# Altium PCB lab2_zhernakov_buck.PcbDoc
Units mm, origin at the board's own origin, x right, y up, seen from the top; angles counter-clockwise.
Board outline 87.7 x 31.5 mm, 2 copper layers (Top Layer, Bottom Layer), stack 1.57 mm thick; 33 components, 19 nets, 113 pads, 148 vias.
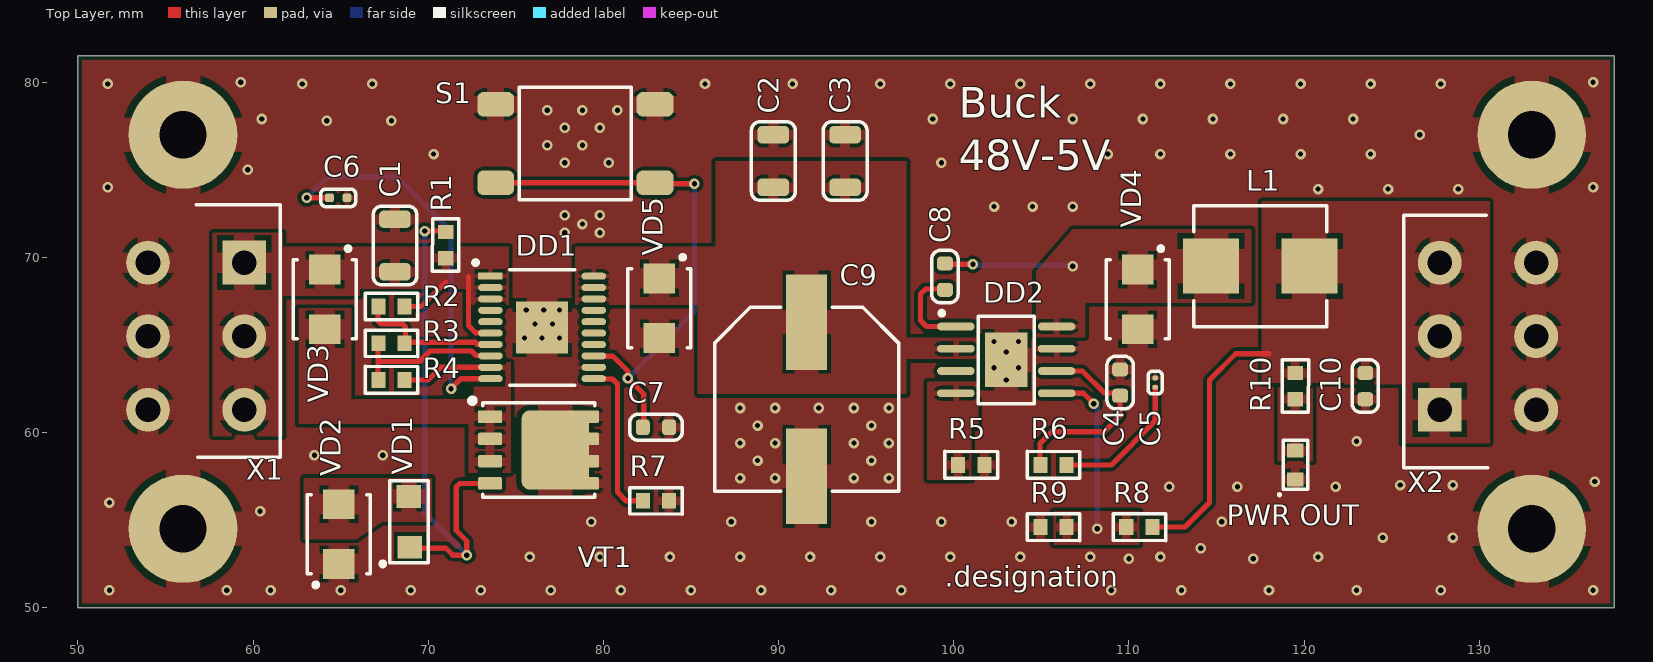
[diagram p0: Top Layer view]
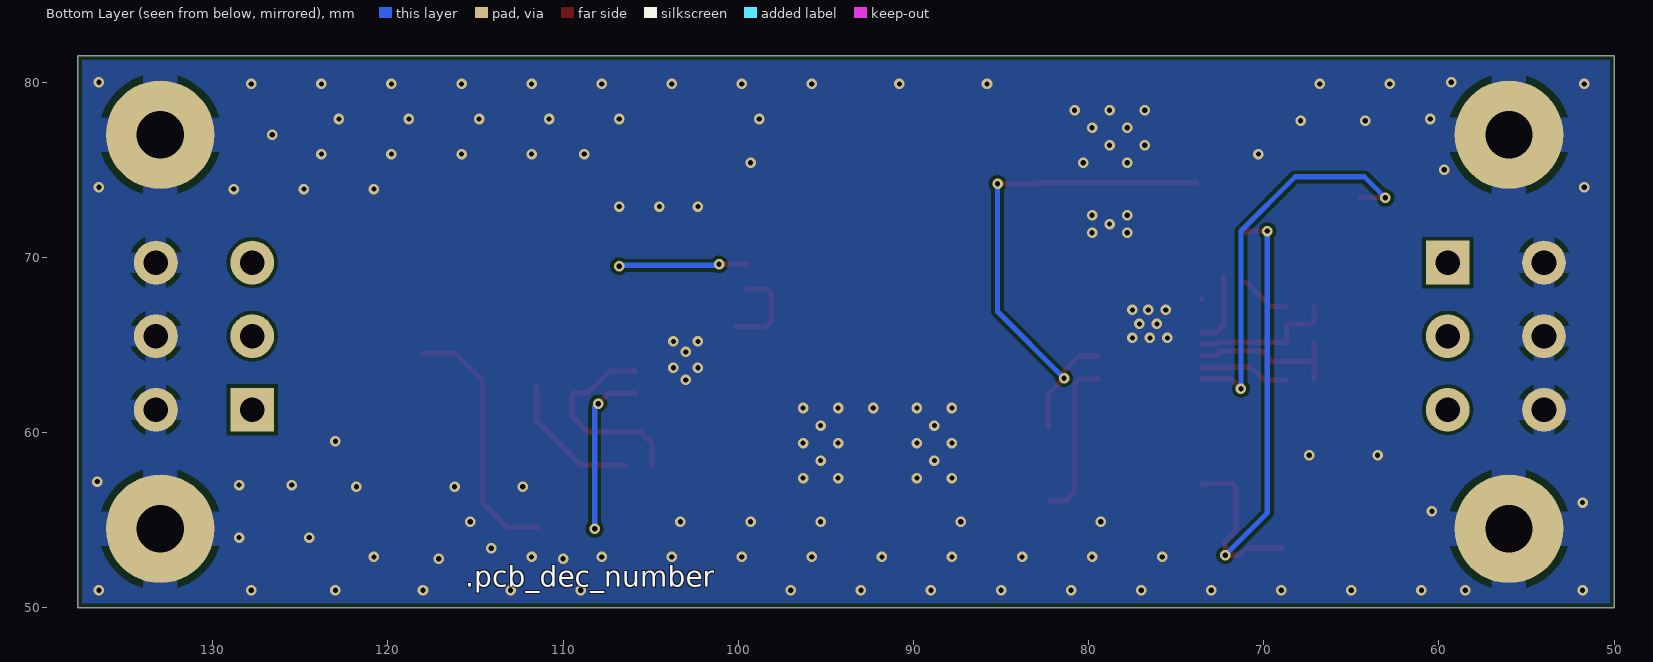
[diagram p1: Bottom Layer view, seen from below]
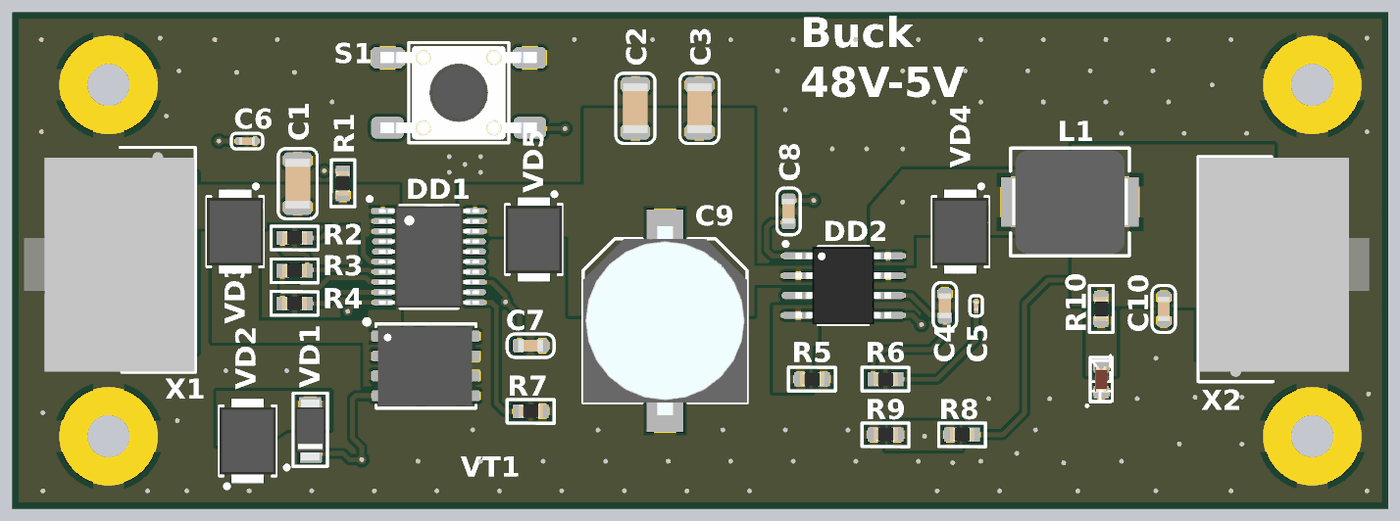
[diagram p2: 3D render of the assembled board from above, using the file's embedded part models]

## Layer stack, top to bottom
Top Solder: solder mask 0.0102, Solder Resist, Dk 3.5
Top Layer: signal copper 0.035
Core 1: core 1.5, FR4, Dk 4.6
Bottom Layer: signal copper 0.035
Bottom Solder: solder mask 0.0102, Solder Resist, Dk 3.5

## Board outline
50,50 137.7,50 137.7,81.5 50,81.5

## Design rules (kind name [scope] priority, off if disabled: settings)
AcuteAngle min_acute_angle [OnCopper] p1: minimum=3.50000000000000E+0001 checktracksonly=FALSE // Минимальный угол между примитивами топологии
BoardOutlineClearance board_outline_clearance_std [NOT (OnLayer('Bottom Overlay') OR OnLayer('Top Overlay'))] p1: gap=0.25 ignorepadtopadclearanceinfootprint=FALSE except(0: Arc-SplitContinuation Track-SplitContinuation SMDPad-SplitContinuation THPad-SplitContinuation Via-SplitContinuation Fill-SplitContinuation Poly-SplitContinuation Region-SplitContinuation Text-SplitContinuation) // Отступ элементов топологии от края фрезеруемой печатной платы
Clearance clearance_outer_35um_std [OnTopLayer OR OnBottomLayer] p1: gap=0.2 ignorepadtopadclearanceinfootprint=TRUE except(0.25: Arc-Hole Track-Hole SMDPad-Hole THPad-Hole Via-Hole Fill-Hole Poly-Hole Region-Hole Text-Hole) // Зазоры на внешних слоях
Clearance clearance_inner_35um_std [NOT (OnTopLayer Or OnBottomLayer)] p2: gap=0.2 ignorepadtopadclearanceinfootprint=FALSE except(0.25: Arc-Hole Track-Hole SMDPad-Hole THPad-Hole Via-Hole Fill-Hole Poly-Hole Region-Hole Text-Hole) // Зазоры на внутренних слоях
ComponentClearance [All] p1: gap=0 collisioncheckmode=3 verticalgap=0 showdistances=FALSE
DiffPairsRouting diff_pairs_routing [All] p1: maxlimit=0.127 minlimit=0.127 mostfreqgap=0.127 toplayer_minwidth=0.143 toplayer_maxwidth=0.143 toplayer_prefwidth=0.143 bottomlayer_minwidth=0.143 bottomlayer_maxwidth=0.143 bottomlayer_prefwidth=0.143 impedanceprofiledriven=TRUE impedanceprofileid={FD46899E-B5A2-4EF5-A302-5D2DB6A51F35} maxuncoupledlength=12.7 // Правила трассировки дифференциальных пар
HoleSize min_hole_size_std [IsPad] p1: absolutevalues=TRUE maxlimit=5.9 minlimit=0.6 maxpercent=80.000 minpercent=20.000 // Диаметр межслойного переходного отверстия
HoleSize min_hole_size_via_std [IsVia] p2: absolutevalues=TRUE maxlimit=5.9 minlimit=0.3 maxpercent=80.000 minpercent=20.000 // Минимальный диаметр монтажного отверстия
HoleToHoleClearance hole_to_hole_clearance_std [All] p1: gap=0.2 allowstackedmicrovias=FALSE // Минимальное расстояние между краями двух отверстий
MinimumAnnularRing min_via_ar_std [All] p1: minimumring=0.15 // Поясок площадки переходного отверстия (Annular ring VIA)
MinimumAnnularRing min_pad_ar_std [All] p2: minimumring=0.2 // Поясок монтажной контактной площадки (Annular ring PAD)
MinimumSolderMaskSliver min_solder_mask_bridge_std [All] p1: minsoldermaskwidth=0.15 // Мнимальная ширина масочного мостика
PlaneClearance plane_clearance_35um_std [All] p1: clearance=0.2 // Отступ полигона (для слоя plane) от элементов топологии
PlaneConnect [All] p1: planeconnectstyle=Relief reliefexpansion=0.5 reliefentries=4 reliefconductorwidth=0.2 reliefairgap=0.2
PolygonConnect poly_connect_to_pad<=0.3 [(AsMM(PadXSize_AllLayers)<=0.301) or (AsMM(PadYSize_AllLayers)<=0.301)] p1: thpad.connectstyle=Relief thpad.reliefconductorwidth=0.2 thpad.reliefentries=4 thpad.polygonreliefangle="90 Angle" thpad.airgapwidth=0.2 smdpad.connectstyle=Relief smdpad.reliefconductorwidth=0.2 smdpad.reliefentries=4 smdpad.polygonreliefangle="90 Angle" smdpad.airgapwidth=0.2 via.connectstyle=Direct via.reliefconductorwidth=0.254 via.reliefentries=4 via.polygonreliefangle="90 Angle" via.airgapwidth=0.254 // Правила подключения полигонов для падов от 0,3мм и меньше
PolygonConnect poly_connect_to_pad<=0.4 [(AsMM(PadXSize_AllLayers)<=0.401) or (AsMM(PadYSize_AllLayers)<=0.401)] p2: thpad.connectstyle=Relief thpad.reliefconductorwidth=0.26 thpad.reliefentries=4 thpad.polygonreliefangle="90 Angle" thpad.airgapwidth=0.2 smdpad.connectstyle=Relief smdpad.reliefconductorwidth=0.26 smdpad.reliefentries=4 smdpad.polygonreliefangle="90 Angle" smdpad.airgapwidth=0.2 via.connectstyle=Direct via.reliefconductorwidth=0.254 via.reliefentries=4 via.polygonreliefangle="90 Angle" via.airgapwidth=0.254 // Правила подключения полигонов для падов от 0,4 и меньше
PolygonConnect poly_connect_to_pad<=0.6 [(AsMM(PadXSize_AllLayers)<=0.601) or (AsMM(PadYSize_AllLayers)<=0.601)] p3: thpad.connectstyle=Relief thpad.reliefconductorwidth=0.33 thpad.reliefentries=4 thpad.polygonreliefangle="90 Angle" thpad.airgapwidth=0.2 smdpad.connectstyle=Relief smdpad.reliefconductorwidth=0.33 smdpad.reliefentries=4 smdpad.polygonreliefangle="90 Angle" smdpad.airgapwidth=0.2 via.connectstyle=Direct via.reliefconductorwidth=0.254 via.reliefentries=4 via.polygonreliefangle="90 Angle" via.airgapwidth=0.254 // Правила подключения полигонов для падов от 0,6мм и меньше
PolygonConnect poly_connect_to_pad<=0.7 [(AsMM(PadXSize_AllLayers)<=0.701) or (AsMM(PadYSize_AllLayers)<=0.701)] p4: thpad.connectstyle=Relief thpad.reliefconductorwidth=0.46 thpad.reliefentries=4 thpad.polygonreliefangle="90 Angle" thpad.airgapwidth=0.2 smdpad.connectstyle=Relief smdpad.reliefconductorwidth=0.46 smdpad.reliefentries=4 smdpad.polygonreliefangle="90 Angle" smdpad.airgapwidth=0.2 via.connectstyle=Direct via.reliefconductorwidth=0.254 via.reliefentries=4 via.polygonreliefangle="90 Angle" via.airgapwidth=0.254 // Правила подключения полигонов для падов от 0,7мм и меньше
PolygonConnect poly_connect_to_pad<=0.8 [(AsMM(PadXSize_AllLayers)<=0.8)or(AsMM(PadYSize_AllLayers)<=0.8)] p5: thpad.connectstyle=Relief thpad.reliefconductorwidth=0.53 thpad.reliefentries=4 thpad.polygonreliefangle="90 Angle" thpad.airgapwidth=0.3 smdpad.connectstyle=Relief smdpad.reliefconductorwidth=0.53 smdpad.reliefentries=4 smdpad.polygonreliefangle="90 Angle" smdpad.airgapwidth=0.2 via.connectstyle=Direct via.reliefconductorwidth=0.254 via.reliefentries=4 via.polygonreliefangle="90 Angle" via.airgapwidth=0.254 // Правила подключения полигонов для падов от 0,8мм и меньше
PolygonConnect poly_connect_to_pad<=1 [(AsMM(PadXSize_AllLayers)<=1.01)or(AsMM(PadYSize_AllLayers)<=1.01)] p6: thpad.connectstyle=Relief thpad.reliefconductorwidth=0.6 thpad.reliefentries=4 thpad.polygonreliefangle="90 Angle" thpad.airgapwidth=0.3 smdpad.connectstyle=Relief smdpad.reliefconductorwidth=0.6 smdpad.reliefentries=4 smdpad.polygonreliefangle="90 Angle" smdpad.airgapwidth=0.2 via.connectstyle=Direct via.reliefconductorwidth=0.254 via.reliefentries=4 via.polygonreliefangle="90 Angle" via.airgapwidth=0.254 // Правила подключения полигонов для падов от 1мм и меньше
PolygonConnect poly_connect_to_pad<=1.3 [(AsMM(PadXSize_AllLayers)<=1.31)or(AsMM(PadYSize_AllLayers)<=1.31)] p7: thpad.connectstyle=Relief thpad.reliefconductorwidth=0.66 thpad.reliefentries=4 thpad.polygonreliefangle="90 Angle" thpad.airgapwidth=0.3 smdpad.connectstyle=Relief smdpad.reliefconductorwidth=0.86 smdpad.reliefentries=4 smdpad.polygonreliefangle="90 Angle" smdpad.airgapwidth=0.2 via.connectstyle=Direct via.reliefconductorwidth=0.254 via.reliefentries=4 via.polygonreliefangle="90 Angle" via.airgapwidth=0.254 // Правила подключения полигонов для падов от 1,3мм и меньше
PolygonConnect poly_connect_to_pad<=1.6 [(AsMM(PadXSize_AllLayers)<=1.61)or(AsMM(PadYSize_AllLayers)<=1.61)] p8: thpad.connectstyle=Relief thpad.reliefconductorwidth=0.8 thpad.reliefentries=4 thpad.polygonreliefangle="90 Angle" thpad.airgapwidth=0.3 smdpad.connectstyle=Relief smdpad.reliefconductorwidth=1 smdpad.reliefentries=4 smdpad.polygonreliefangle="90 Angle" smdpad.airgapwidth=0.2 via.connectstyle=Direct via.reliefconductorwidth=0.254 via.reliefentries=4 via.polygonreliefangle="90 Angle" via.airgapwidth=0.254 // Правила подключения полигонов для падов от 1,6мм и меньше
PolygonConnect poly_connect_to_pad<=1.8 [(AsMM(PadXSize_AllLayers)<=1.8)or(AsMM(PadYSize_AllLayers)<=1.8)] p9: thpad.connectstyle=Relief thpad.reliefconductorwidth=1 thpad.reliefentries=4 thpad.polygonreliefangle="90 Angle" thpad.airgapwidth=0.3 smdpad.connectstyle=Relief smdpad.reliefconductorwidth=1.2 smdpad.reliefentries=4 smdpad.polygonreliefangle="90 Angle" smdpad.airgapwidth=0.2 via.connectstyle=Direct via.reliefconductorwidth=0.254 via.reliefentries=4 via.polygonreliefangle="90 Angle" via.airgapwidth=0.254 // Правила подключения полигонов для падов от 1,8мм и меньше
PolygonConnect poly_connect_to_pad<=2 [(AsMM(PadXSize_AllLayers)<=2.01)or(AsMM(PadYSize_AllLayers)<=2.01)] p10: thpad.connectstyle=Relief thpad.reliefconductorwidth=1.1 thpad.reliefentries=4 thpad.polygonreliefangle="90 Angle" thpad.airgapwidth=0.3 smdpad.connectstyle=Relief smdpad.reliefconductorwidth=1.4 smdpad.reliefentries=4 smdpad.polygonreliefangle="90 Angle" smdpad.airgapwidth=0.2 via.connectstyle=Direct via.reliefconductorwidth=0.254 via.reliefentries=4 via.polygonreliefangle="90 Angle" via.airgapwidth=0.254 // Правила подключения полигонов для падов от 2мм и меньше
PolygonConnect poly_connect_to_pad<=2.3 [(AsMM(PadXSize_AllLayers)<=2.31)or(AsMM(PadYSize_AllLayers)<=2.31)] p11: thpad.connectstyle=Relief thpad.reliefconductorwidth=1.2 thpad.reliefentries=4 thpad.polygonreliefangle="90 Angle" thpad.airgapwidth=0.3 smdpad.connectstyle=Relief smdpad.reliefconductorwidth=1.4 smdpad.reliefentries=4 smdpad.polygonreliefangle="90 Angle" smdpad.airgapwidth=0.2 via.connectstyle=Direct via.reliefconductorwidth=0.254 via.reliefentries=4 via.polygonreliefangle="90 Angle" via.airgapwidth=0.254 // Правила подключения полигонов для падов от 2,3мм и меньше
PolygonConnect poly_connect_to_pad<=2.5 [(AsMM(PadXSize_AllLayers)<=2.51)or(AsMM(PadYSize_AllLayers)<=2.51)] p12: thpad.connectstyle=Relief thpad.reliefconductorwidth=1.2 thpad.reliefentries=4 thpad.polygonreliefangle="90 Angle" thpad.airgapwidth=0.3 smdpad.connectstyle=Relief smdpad.reliefconductorwidth=1.4 smdpad.reliefentries=4 smdpad.polygonreliefangle="90 Angle" smdpad.airgapwidth=0.2 via.connectstyle=Direct via.reliefconductorwidth=0.254 via.reliefentries=4 via.polygonreliefangle="90 Angle" via.airgapwidth=0.254 // Правила подключения полигонов для падов от 2,5мм и меньше
PolygonConnect poly_connect_to_pad<=2.7 [(AsMM(PadXSize_AllLayers)<=2.71)or(AsMM(PadYSize_AllLayers)<=2.71)] p13: thpad.connectstyle=Relief thpad.reliefconductorwidth=1.4 thpad.reliefentries=4 thpad.polygonreliefangle="90 Angle" thpad.airgapwidth=0.3 smdpad.connectstyle=Relief smdpad.reliefconductorwidth=1.6 smdpad.reliefentries=4 smdpad.polygonreliefangle="90 Angle" smdpad.airgapwidth=0.2 via.connectstyle=Direct via.reliefconductorwidth=0.254 via.reliefentries=4 via.polygonreliefangle="90 Angle" via.airgapwidth=0.254 // Правила подключения полигонов для падов от 2,7мм и меньше
PolygonConnect poly_connect_to_pad<=3 [(AsMM(PadXSize_AllLayers)<=3.01)or(AsMM(PadYSize_AllLayers)<=3.01)] p14: thpad.connectstyle=Relief thpad.reliefconductorwidth=1.6 thpad.reliefentries=4 thpad.polygonreliefangle="90 Angle" thpad.airgapwidth=0.3 smdpad.connectstyle=Relief smdpad.reliefconductorwidth=1.8 smdpad.reliefentries=4 smdpad.polygonreliefangle="90 Angle" smdpad.airgapwidth=0.2 via.connectstyle=Direct via.reliefconductorwidth=0.254 via.reliefentries=4 via.polygonreliefangle="90 Angle" via.airgapwidth=0.254 // Правила подключения полигонов для падов от 3мм и меньше
PolygonConnect poly_connect_to_pad<=7 [(AsMM(PadXSize_AllLayers)<7.01)or(AsMM(PadYSize_AllLayers)<=7.01)] p15: thpad.connectstyle=Relief thpad.reliefconductorwidth=2 thpad.reliefentries=4 thpad.polygonreliefangle="90 Angle" thpad.airgapwidth=0.4 smdpad.connectstyle=Relief smdpad.reliefconductorwidth=2 smdpad.reliefentries=4 smdpad.polygonreliefangle="90 Angle" smdpad.airgapwidth=0.3 via.connectstyle=Direct via.reliefconductorwidth=0.254 via.reliefentries=4 via.polygonreliefangle="90 Angle" via.airgapwidth=0.254 // Правила подключения полигонов для падов от 7мм и меньше
PolygonConnect poly_connect_to_pad [All] p16: thpad.connectstyle=Relief thpad.reliefconductorwidth=0.25 thpad.reliefentries=4 thpad.polygonreliefangle="90 Angle" thpad.airgapwidth=0.2 smdpad.connectstyle=Relief smdpad.reliefconductorwidth=0.25 smdpad.reliefentries=4 smdpad.polygonreliefangle="90 Angle" smdpad.airgapwidth=0.2 via.connectstyle=Direct via.reliefconductorwidth=0.25 via.reliefentries=4 via.polygonreliefangle="90 Angle" via.airgapwidth=0.2 // Правила подключения полигонов общие
RoutingCorners [All] p1 off: cornerstyle=45-Degree minsetback=2.5 maxsetback=2.5
RoutingVias [All] p1: holewidth=0.3 width=0.6 viastyle="Through Hole" minholewidth=0.3 minwidth=0.6 maxholewidth=5.9 maxwidth=6.4
SilkToSilkClearance silk_to_silk_clearance_std [All] p1 off: silktosilkclearance=0.15 // Отступ текста шелкографии от других примитивов шелкографии
SilkToSolderMaskClearance silk_to_solder_mask_clearance_std [IsPad] p1 off: minsilkscreentomaskgap=0.15 clearancetoexposedcopper=FALSE // Минимальное расстояние между элементами шелкографии и вскрытой медью
SolderMaskExpansion solder_mask_expansion_std [All] p1: expansion=0.05 // Припуск паяльной масски
UnRoutedNet [All] p1: checkbadconnections=TRUE
Width width_35um_std [All] p1: maxlimit=10 minlimit=0.2 preferedwidth=0.2 checkconnectedcopper=TRUE // Ширина проводников (общая)
19 further rules are at their usual default settings.

## Components (designator, comment, footprint, x,y, rotation, side; value= is the part's Value field where it differs from the comment)
C1 "1 мк" C1206 68.1,70.675 r90 top
C2 "2,2 мк" C1206 89.7,75.5 r90 top
C3 "2,2 мк" C1206 93.8,75.5 r90 top
C4 "82" C0603 109.5,62.85 r90 top
C5 "0,022 мк" C0201 111.5,62.85 r90 top
C6 "6800" C0402 64.86,73.4 r0 top
C7 "0,1 мк" C0603 83,60.3 r0 top
C8 "0,1 мк" C0603 99.5,68.9 r270 top
C9 "47 мк" CAPAE-1000X1000X1200 91.6,61.9 r270 top
C10 "22 мк" C0603 123.5,62.65 r270 top
DD1 "TPS16630PWPR" HTSSOP-20 76.5,66 r0 top
DD2 "TPS54360BDDA" HSOIC-8 103,64.15 r0 top
L1 "SRP7028A-220M" SRP-2-670X660X280 117.5,69.5 r0 top
"PWR OUT" "TLMS1000-GS08" HL0603 119.5,58.15 r90 top (schematic designator HL1)
R1 "750" R0603 71,70.7 r270 top
R2 "1,54 М" R0603 67.9,67.2 r0 top
R3 "8,06 к" R0603 67.9,65.1 r0 top
R4 "40,2 к" R0603 67.9,63 r180 top
R5 "97,6 к" R0603 101,58.15 r180 top
R6 "4,99 к" R0603 105.7,58.15 r180 top
R7 "5,1 к" R0603 83,56.1 r0 top
R8 "53,6 к" R0603 110.6,54.6 r0 top
R9 "10,2 к" R0603 105.7,54.6 r0 top
R10 "220" R0603 119.5,62.65 r90 top
S1 "FSM4JSMA" FSM4JSMA 78.4,76.5 r0 top
VD1 "BZD17C15P" DO-219AB 68.9,54.9 r90 top
VD2 "SS36-E3/57T" DO-214AB 64.9,54.2 r90 top
VD3 "1.5SMC62CA" DO-214AB 64.1,67.6 r270 top
VD4 "SS36-E3/57T" DO-214AB 110.5,67.6 r270 top
VD5 "SS36-E3/57T" DO-214AB 83.2,67.1 r270 top
VT1 "CSD19532Q5B" SON-8 76.3,59 r270 top
X1 "4-1775099-1" 4-1775099-1 56.75,65.5 r270 top
X2 "4-1775099-1" 4-1775099-1 130.5,65.5 r90 top

## Footprints (in the part's own frame and the unit in brackets; to place one, negate y for a bottom-side part, rotate by r counter-clockwise, add the part's x,y. Pads: shape width x height; smd on the part's side, far side on the other; paste and mask are expansions set on the pad)
4-1775099-1 [mm]
  rect 2.5x2.5 hole 1.4: 1(-4.2,2.75)
  round 2.5 hole 1.4: 2(0,2.75) 3(4.2,2.75) 4(-4.2,-2.75) 5(0,-2.75) 6(4.2,-2.75)
  silkscreen extent -7.5,0 6.9,4.8, body extent -7.2,-6.15 6.85,4.75, height 12.8
C0201 [mm] "Chip Capacitor, 2-Leads, Body 0,60x0,30mm, IPC Medium Density"
  rrect50% 0.28x0.3 smd: 1(-0.265,0) 2(0.265,0)
  silkscreen extent -0.65,-0.4 0.65,0.4, body extent -0.3,-0.15 0.3,0.15, height 0.29
C0402 [mm] "Chip Capacitor, 2-Leads, Body 1,00x0,50mm, IPC Medium Density"
  rrect50% 0.5x0.5 smd: 1(-0.5,0) 2(0.5,0)
  silkscreen extent -1,-0.5 1,0.5, body extent -0.5,-0.25 0.5,0.25, height 0.5
C0603 [mm] "Chip Capacitor, 2-Leads, Body 1,60x0,80mm, IPC Medium Density"
  rrect50% 0.8x0.9 smd: 1(-0.75,0) 2(0.75,0)
  silkscreen extent -1.5,-0.75 1.5,0.75, body extent -0.8,-0.4 0.8,0.4, height 0.8
C1206 [mm] "Chip Capacitor, 2-Leads, Body 3,20x1,60mm, IPC Medium Density"
  rrect50% 1x1.8 smd: 1(-1.5,0) 2(1.5,0)
  silkscreen extent -2.25,-1.25 2.25,1.25, body extent -1.6,-0.8 1.6,0.8, height 0.78
CAPAE-1000X1000X1200 [mm] "Aluminum Electrolytic Capacitor, Body 10,50x10,50x12,50mm, IPC Low Density"
  rect 5.45x2.35 smd: 1(-4.4,0) 2(4.4,0)
  silkscreen extent -5.25,-5.25 5.25,5.25, body extent -6.05,-5.25 6.05,5.25, height 12.5
DO-214AB [mm] "Molded Diode, 2-Leads, Body 6,86x5,91mm, IPC Medium Density"
  rect 1.7x1.8 smd: 1(-1.7,0) 2(1.7,0)
  silkscreen extent -3.02,-1.8 2.25,1.8, body extent -2.7,-1.81 2.7,1.81, height 2.43
DO-219AB [mm]
  rect 1.3x1.4 smd: 1(-1.45,-0.05) 2(1.45,0)
  silkscreen extent -2.45,-1.1 2.35,1.55, body extent -1.95,-0.95 1.95,0.95, height 1.25
FSM4JSMA [mm]
  rrect50% 2.1x1.4 smd: 1(-4.55,2.24) 1(4.55,2.24) 2(-4.55,-2.24) 2(4.55,-2.24)
  silkscreen extent -3.2,-3.2 3.2,3.2, body extent -5,-3 5,3, height 5.13
HL0603 [mm] "Chip Diode, 2-Leads, Body 1,60x0,80mm, IPC Medium Density"
  rect 0.8x0.95 smd: 1(-0.825,0) 2(0.825,0)
  silkscreen extent -1.75,-0.7 1.4,0.95, body extent -0.81,-0.4 0.81,0.4, height 0.6
HSOIC-8 [mm] "SOIC, 8-Leads, Body 4,90x3,90mm, Pitch 1,27mm, Thermal Pad 3,10x2,40mm, IPC Medium Density"
  rect 2.4x3.1 smd: 0(0,0)
  oval 2.15x0.45 smd: 1(-2.875,1.905) 2(-2.875,0.635) 3(-2.875,-0.635) 4(-2.875,-1.905) 5(2.875,-1.905) 6(2.875,-0.635) 7(2.875,0.635) 8(2.875,1.905)
  silkscreen extent -3.81,-2.5 1.6,2.79, body extent -3.06,-2.47 3.06,2.48, height 1.75
HTSSOP-20 [mm] "TSOP, 20-Leads, Body 6,50x4,40mm, Pitch 0,65mm, Thermal Pad 2,96x2,96mm, IPC Medium Density"
  rect 2.96x2.96 smd: 0(0,0)
  rect 1.4x0.4 smd: 1(-2.95,2.925)
  oval 1.4x0.4 smd: 2(-2.95,2.275) 3(-2.95,1.625) 4(-2.95,0.975) 5(-2.95,0.325) 6(-2.95,-0.325) 7(-2.95,-0.975) 8(-2.95,-1.625) 9(-2.95,-2.275) 10(-2.95,-2.925) 11(2.95,-2.925) 12(2.95,-2.275) 13(2.95,-1.625) 14(2.95,-0.975) 15(2.95,-0.325) 16(2.95,0.325) 17(2.95,0.975) 18(2.95,1.625) 19(2.95,2.275) 20(2.95,2.925)
  silkscreen extent -3.92,-3.3 1.85,3.82, body extent -3.2,-3.25 3.2,3.25, height 1.1
R0603 [mm] "Chip Resistor, 2-Leads, Body 1,60x0,80mm, IPC Medium Density"
  rect 0.8x0.9 smd: 1(-0.75,0) 2(0.75,0)
  silkscreen extent -1.5,-0.77 1.5,0.75, body extent -0.77,-0.43 0.78,0.43, height 0.43
SON-8 [mm]
  rrect25% 0.71x1.372 smd paste-10: D(-1.905,2.77) D(-0.635,2.77) D(0.635,2.77) D(1.905,2.77)
  rrect25% 4.52x3.85 smd paste-10: D(0,0.95)
  rrect25% 0.71x1.372 smd paste-0.002: G(1.905,-2.77) S(-0.635,-2.77) S(0.635,-2.77)
  rect 0.71x1.372 smd paste-0.002: S(-1.905,-2.77)
  silkscreen extent -2.83,-3.78 2.7,3.2, body extent -2.48,-3.05 2.52,2.95, height 1.05
SRP-2-670X660X280 [mm] "Precision Wire Wound Inductor, 2-Leads, Body 7,30x6,60mm, IPC Medium Density"
  rect 3.2x3.15 smd: 1(-2.8,0) 2(2.8,0)
  silkscreen extent -3.8,-3.45 3.8,3.45, body extent -3.7,-3.3 3.7,3.3, height 3

## Part data
C1 C2 C3: library part c0068, "=Описание", HelpURL=https://www.yageo.com/upload/media/product/productsearch/datasheet/mlcc/UPY-NP0X7R_MV_100-to-630V_22.pdf, ID=c0068, Корпус=1206, Напряжение="100 В", Номинальное напряжение="100 В", Отклонение="±10 %", Производитель="YAGEO Corp.", Рабочие температуры="от –55 °С до +125 °С", Фамилия=Ларионов
  C1: Наименование=CC1206KKX7R0BB105, Номинал="1 мк", Описание="Конденсатор чип 1206 1 мкФ 100 В ±10 %", Температурный коэффициент емкости=X7R
  C2 C3: Наименование=CC1206KKX7R0BB225, Номинал="2,2 мк", Описание="Конденсатор чип 1206 2,2 мкФ 100 В ±10 %", ТКЕ=X7R
C4: library part c0011, "=Описание", HelpURL=https://www.yageo.com/upload/media/product/productsearch/datasheet/mlcc/UPY-GP_NP0_16V-to-50V_18.pdf, ID=c0011, Корпус=0603, Наименование=CC0603JRNPO7BN820, Напряжение="16 В", Номинал=82, Номинальное напряжение="16 В", Описание="Конденсатор чип 0603 82 пФ 16 В ±5 %", Отклонение="±5 %", Производитель="YAGEO Corp.", Рабочие температуры="от –55 °С до +125 °С", Температурный коэффициент емкости=C0G, Фамилия=Ларионов
C5: library part c0024, "=Описание", HelpURL=https://www.yageo.com/upload/media/product/productsearch/datasheet/mlcc/UPY-GPHC_X5R_4V-to-50V_26.pdf, ID=c0024, Корпус=0201, Наименование=CC0201KRX5R7BB223, Напряжение="16 В", Номинал="0,022 мк", Номинальное напряжение="16 В", Описание="Конденсатор чип 0201 22 нФ 16 В ±10 %", Отклонение="±10 %", Производитель="YAGEO Corp.", Рабочие температуры="от –55 °С до +85 °С", Температурный коэффициент емкости=X5R, Фамилия=Жернаков
C6: library part c0005, "=Описание", HelpURL=http://product.samsungsem.com/mlcc/CL05B682JB5NNN.do, ID=c0005, Корпус=0402, Наименование=CL05B682JB5NNNC, Напряжение="50 В", Номинал=6800, Номинальное напряжение="50 В", Описание="Конденсатор чип 0402 6,8 нФ 50 В ±5 %", Отклонение="±5 %", Производитель="Samsung electro-mechanics", Рабочие температуры="от –55 °С до +125 °С", Температурный коэффициент емкости=C0G, Фамилия=Жернаков
C7: library part c0038, "=Описание", HelpURL=https://www.yageo.com/upload/media/product/productsearch/datasheet/mlcc/UPY-NP0X7R_MV_100-to-630V_22.pdf, ID=c0038, Корпус=0603, Наименование=CC0603KRX7R0BB104, Напряжение="100 В", Номинал="0,1 мк", Номинальное напряжение="100 В", Описание="Конденсатор чип 0603 100 нФ 100 В ±10 %", Отклонение="±10 %", Производитель="YAGEO Corp.", Рабочие температуры="от –55 °С до +125 °С", Температурный коэффициент емкости=X7R, Фамилия=Ларионов
C8: library part c0027, "=Описание", HelpURL=https://www.yageo.com/upload/media/product/products/datasheet/mlcc/UPY-GPHC_X7R_6.3V-to-50V_20.pdf, ID=c0027, Корпус=0603, Наименование=CC0603KRX7R9BB104, Напряжение="50 В", Номинал="0,1 мк", Номинальное напряжение="50 В", Описание="Конденсатор чип 0603 0,1 мкФ 50 В ±10 %", Отклонение="±10 %", Производитель="YAGEO Corp.", Рабочие температуры="от –55 °С до +125 °С", ТКЕ=X7R, Фамилия=Паньков
C9: library part c0118, "=Описание", HelpURL=https://www.vishay.com/capacitors/list/product-28403/, ID=c0118, Корпус="CAPAE (10 x 10 x 12)", Наименование=MAL214699904E3, Напряжение="100 В", Номинал="47 мк", Номинальное напряжение="100 В", Описание="Конденсатор электролитический 47 мкФ 100 В ±20 %", Отклонение="±20 %", Производитель="Vishay Intertechnology, Inc.", Рабочие температуры="от –55 °С до +125 °С", Температурный коэффициент емкости=-, Фамилия=Ларионов
C10: library part c0101, "=Описание", HelpURL=https://www.yageo.com/upload/media/product/productsearch/datasheet/mlcc/UPY-GPHC_X5R_4V-to-50V_26.pdf, ID=c0101, Корпус=0603, Наименование=CC0603MPX5R6BB226, Напряжение="10 В", Номинал="22 мк", Номинальное напряжение="10 В", Описание="Конденсатор чип 0603 22 мкФ 10 В ±20 %", Отклонение="±20 %", Производитель="YAGEO Corp.", Рабочие температуры="от –55 °С до +85 °С", Температурный коэффициент емкости=X5R, Фамилия=Чернов
DD1 DD2: library part dd0002, "=Описание", ID=dd0002, Производитель="Texas Instruments", Фамилия=Жернаков
  DD1: HelpURL=https://www.ti.com/product/TPS1663, Корпус=HTSSOP-20, Максимальное напряжение="67 В", Наименование=TPS16630PWPR, Напряжение="от 4,5 В до 60 В", Описание="Защитная микросхема eFuse 60 В и 6 А", Рабочие температуры="от -40 °С до +125 °С", Ток="от 0,6 А до 6 А"
  DD2: HelpURL=https://www.ti.com/product/TPS54360B#product-details##params, Входное напряжение="от 4,5 В до 60 В", Выходное напряжение="от 1 В до 58,8 В", Коммутируемый ток="от 0 А до 3,5 А", Корпус=HSOIC-8, Наименование=TPS54360BDDA, Описание="Понижающий преобразователь напряжения 60 В и 3,5 А", Рабочие температуры="от -40 °С до +150 °С", Частота переключения="от 100 кГц до 2,5 МГц"
L1: library part l0006, "=Описание", HelpURL=https://www.bourns.com/products/magnetic-products/power-inductors-aec-q200-compliant/product/SRP7028A, ID=l0006, Индуктивность="22 мкГн", Корпус="6,7 x 6,6 x 2,8", Максимальное активное сопротивление="190 мОм", Наименование=SRP7028A-220M, Номинал="22 мкГн", Номинальное активное сопротивление="165 мОм", Номинальный ток (при нагреве на 20 °С/40 °С)="2 А", Описание="Катушка индуктивности 22 мкГн ±20 %", Отклонение="±20 %", Производитель="Bourns, Inc.", Рабочее напряжение="не указано", Рабочие температуры="от –55 °С до +150 °С", Резонансная частота="10 МГц", Ток насыщения="3,5 А", Фамилия=Ларионов
"PWR OUT": library part hl0001, "=Описание", HelpURL=https://www.vishay.com/leds/list/product-83172/, ID=hl0001, Корпус=0603, Наименование=TLMS1000-GS08, Номинальная длина волны="628 нм", Номинальная сила света="4 мкд", Номинальное падение напряжения="1,8 В", Номинальный прямой ток="15 мА", Описание="Светодиод чип 0603 красный", Производитель="Vishay Intertechnology, Inc.", Рабочие температуры="от -40 °С до +100 °С", Рассеиваемая мощность="40 мВт", Фамилия=Ларионов, Цвет=Red
R1 R4: library part r0028, "=Описание", HelpURL=https://www.yageo.com/upload/media/product/productsearch/datasheet/rchip/PYu-RC_Group_51_RoHS_L_11.pdf, ID=r0028, Корпус=0603, Номинальное напряжение="75 В", Номинальный ток="1 А", Отклонение="±1 %", Производитель="YAGEO Corp."
  R1: Наименование=RC0603FR-07750RL, Номинал=750, Описание="Резистор чип 0603 750 Ом ±1 % 0,1 Вт", Рабочие температуры="от –55 °С до +155 °С", Фамилия=Паньков
  R4: Наименование=RC0603FR-0740K2L, Номинал="40,2 к", Описание="Резистор чип 0603 40,2 кОм ±1 % 0,1 Вт", Рабочие температуры="от -55 °С до +155 °С", Фамилия=Жернаков
R2: library part r0042, "=Описание", HelpURL=https://www.yageo.com/upload/media/product/productsearch/datasheet/rchip/PYu-RC_Group_51_RoHS_L_11.pdf, ID=r0042, Корпус=0603, Наименование=RC0603FR-071M54L, Номинал="1,54 М", Номинальное напряжение="75 В", Номинальный ток="1 А", Описание="Резистор чип 0603 1,54 МОм ±1 % 0,1 Вт", Отклонение="±1 %", Производитель="YAGEO Corp.", Рабочие температуры="от -55 °С до +155 °С", Фамилия=Жернаков
R3: library part r0020, "=Описание", HelpURL=https://www.yageo.com/upload/media/product/productsearch/datasheet/rchip/PYu-RC_Group_51_RoHS_L_11.pdf, ID=r0020, Корпус=0603, Наименование=RC0603FR-078K06L, Номинал="8,06 к", Номинальное напряжение="75 В", Номинальный ток="1 А", Описание="Резистор чип 0603 8,06 кОм ±1 % 0,1 Вт", Отклонение="±1 %", Производитель="YAGEO Corp.", Рабочие температуры="от -55 °С до +155 °С", Фамилия=Жернаков
R5: library part r0029, "=Описание", HelpURL=https://www.yageo.com/upload/media/product/productsearch/datasheet/rchip/PYu-RC_Group_51_RoHS_L_11.pdf, ID=r0029, Корпус=0603, Наименование=RC0603FR-0797K6L, Номинал="97,6 к", Номинальное напряжение="75 В", Номинальный ток="1 А", Описание="Резистор чип 0603 97,6 кОм ±1 % 0,1 Вт", Отклонение="±1 %", Производитель="YAGEO Corp.", Рабочие температуры="от -55 °С до +155 °С", Фамилия=Водорезов
R6 R8: library part r0017, "=Описание", HelpURL=https://www.yageo.com/upload/media/product/productsearch/datasheet/rchip/PYu-RC_Group_51_RoHS_L_11.pdf, ID=r0017, Корпус=0603, Номинальное напряжение="75 В", Номинальный ток="1 А", Производитель="YAGEO Corp.", Рабочие температуры="от -55 °С до +155 °С", Фамилия=Жернаков
  R6: Наименование=RC0603FR-074K99L, Номинал="4,99 к", Описание="Резистор чип 0603 4,99 кОм ±1 % 0,1 Вт", Отклонение="±1 %"
  R8: Наименование=RC0603BR-0753K6L, Номинал="53,6 к", Описание="Резистор чип 0603 53,6 кОм ±0,1 % 0,1 Вт", Отклонение="±0,1 %"
R7: library part r0019, "=Описание", HelpURL=https://www.yageo.com/upload/media/product/productsearch/datasheet/rchip/PYu-RC_Group_51_RoHS_L_11.pdf, ID=r0019, Корпус=0603, Наименование=RC0603FR-075K1L, Номинал="5,1 к", Номинальное напряжение="75 В", Номинальный ток="1 А", Описание="Резистор чип 0603 5,1 кОм ±1 % 0,1 Вт", Отклонение="±1 %", Производитель="YAGEO Corp.", Рабочие температуры="от -55 °С до +155 °С", Фамилия=Жернаков
R9: library part r0014, "=Описание", HelpURL=https://www.yageo.com/upload/media/product/productsearch/datasheet/rchip/PYu-RC_Group_51_RoHS_L_11.pdf, ID=r0014, Корпус=0603, Наименование=RC0603FR-0710K2L, Номинал="10,2 к", Номинальное напряжение="75 В", Номинальный ток="1 А", Описание="Резистор чип 0603 10,2 кОм ±1 % 0,1 Вт", Отклонение="±1 %", Производитель="YAGEO Corp.", Рабочие температуры="от -55 °С до +155 °С", Фамилия=Жернаков
R10: library part r0009, "=Описание", HelpURL=https://www.yageo.com/upload/media/product/productsearch/datasheet/rchip/PYu-RC_Group_51_RoHS_L_11.pdf, ID=r0009, Корпус=0603, Наименование=RC0603FR-07220RL, Номинал=220, Номинальное напряжение="75 В", Номинальный ток="1 А", Описание="Резистор чип 0603 220 Ом ±1 % 0,1 Вт", Отклонение="±1 %", Производитель="YAGEO Corp.", Рабочие температуры="от -55 °С до +155 °С", Фамилия=Ларионов
S1: library part sw0001, "=Описание", HelpURL=https://www.te.com/usa-en/product-4-1437565-1.html, ID=sw0001, Количество контактов=4, Корпус=6,00x6,00x4,98, Наименование=FSM4JSMA, Описание="Тактовая кнопка поверхностного монтажа", Производитель="TE Connectivity", Промывка=Разрешена, Рабочие температуры="от –35 °С до +85 °С", Сопротивление контакта="100 мОм", Ток нагрузки="50 мА @ 24 В", Фамилия=Паньков
VD1: library part vd0016, "=Описание", HelpURL=https://www.vishay.com/product?docid=85161, ID=vd0016, Корпус=DO-219AB, Наименование=BZD17C15P, Номинальное напряжение стабилизации="15 В", Номинальный ток стабилизации="50 мА", Описание="Стабилитрон 15 В", Производитель="Vishay Intertechnology, Inc.", Рабочие температуры="от –55 °С до +150 °С", Разброс напряжения стабилизации="13,8...15,6 В", Фамилия=Жернаков
VD2 VD4 VD5: library part vd0003, "=Описание", HelpURL=https://www.vishay.com/product?docid=88751, ID=vd0003, Импульсное обратное напряжение="60 В", Корпус=DO-214AB, Макс допустимый средний прямой ток="3 А", Наименование=SS36-E3/57T, Описание="Диод Шоттки 60 В 3 А", Пиковое прямое напряжение="0,75 В", Производитель="Vishay Intertechnology, Inc.", Фамилия=Жернаков
  VD2 VD5: Рабочие температуры="от -55 °С до +150 °С"
  VD4: Рабочие температуры="от –55 °С до +150 °С"
VD3: library part vd0004, "=Описание", HelpURL=https://www.littelfuse.com/products/tvs-diodes/surface-mount/1_5smc.aspx, ID=vd0004, Корпус=DO-214AB, Наименование=1.5SMC62CA, Описание="Двунаправленная диодная сборка для подавления помех, 53 В", Производитель="Littelfuse, Inc.", Фамилия=Ларионов
VT1: library part vt0001, "=Описание", HelpURL=https://www.ti.com/product/CSD19532Q5B?keyMatch=CSD19532Q5B&tisearch=Search-EN-everything&usecase=OPN, ID=vt0001, Корпус=SON-8, Наименование=CSD19532Q5B, Напряжение затвор-исток="±20 В", Напряжение сток-исток="100 В", Описание="Транзистор полевой N-канальный 100 В 17 А", Производитель="Texas Instruments", Рабочие температуры="от -55 °С до +150 °С", Сопротивление сток-исток="0,0057 Ом", Ток стока="17 А", Фамилия=Жернаков
X1 X2: library part x0005, "=Описание", Contact_4=GND, Contact_5=GND, Contact_6=GND, HelpURL=https://www.te.com/usa-en/product-4-1775099-1.html?q=ATX%2BPower&source=header, ID=x0005, Наименование=4-1775099-1, Описание="ATX Power 6 pin гнездо прямой", Производитель="TE Connectivity", Фамилия=Жернаков
  X1: Contact_1=+48V, Contact_2=+48V, Contact_3=+48V
  X2: Contact_1=+5V, Contact_2=+5V, Contact_3=+5V

## Free pads (board coordinates)
  round 6.2 hole 2.7: 2(56,54.5) 2(56,77) 2(133,54.5) 2(133,77)

## Via types
v1: diameter 0.6, hole 0.3, Top Layer to Bottom Layer, tented both sides, 134 vias
v2: diameter 0.6, hole 0.3, Top Layer to Bottom Layer, tented top, 14 vias

## Nets (pads, with @x,y where several pads share a name; then routed paths per layer and width w, separated by ;. In a path a pad name is that pad's centre, name@x,y a point inside that pad or via, vN(x,y) a via of type N, cw(c..) or ccw(c..) an arc to the next point about the centre after c; other vN are vias at no path point)
5V_OUT: C10.1 L1.2 R8.2 R10.2 X2.1 X2.2 X2.3 | length 14.8
  Top Layer w0.3: R8.2@111.375,54.6 113.2,54.6 114.6,56 114.6,63 116.1,64.5 118,64.5
48V_IN: C1.1 DD1.1 DD1.2 DD1.3 DD1.6 R1.2 R2.2 VD3.1 X1.1 X1.2 X1.3 | length 7.2
  Top Layer w0.3: R2.2@68.675,67.2 69.6,67.2 71,68.6 ; 72.3,68.9 72.3,66.1 72.706,65.694 73.531,65.694 DD1.6 ; DD1.3@73.531,67.606 DD1.3
BOOT: C8.2 DD2.1 | length 5.2
  Top Layer w0.3: C8.2@99.5,68.2 98.4,68.2 98.1,67.9 98.1,66.4 98.445,66.055 DD2.1
FB: DD2.5 R8.1 R9.2 | length 9.6
  Top Layer w0.3: DD2.5 107.405,62.245 v1(108,61.65)
  Bottom Layer w0.3: v1(108,61.65) 108.2,61.45 v1(108.2,54.5)
GND: "PWR OUT.1" C1.2 C2.2 C3.2 C4.2 C5.2 C6.2 C7.2 C9.2 C10.2 DD1.0 DD1.12 DD2.0 DD2.7 pad.2 R5.1 R7.2 R9.1 S1.1 VD2.1 VD4.2 VD5.2 VT1.D X1.4 X1.5 X1.6 X2.4 X2.5 X2.6
  other v1: 51.8,51 58.5,51 61,51 65,51 69,51 73,51 77,51 81,51 85,51 89,51 93,51 97,51 109,51 113,51 118,51 123,51 127.8,51 136.5,51 110,52.8 117.1,52.8 75.8,52.9 79.8,52.9 83.8,52.9 87.8,52.9 91.8,52.9 95.8,52.9 99.8,52.9 103.8,52.9 107.8,52.9 111.8,52.9 120.8,52.9 114.1,53.4 124.5,54 128.5,54 79.3,54.9 87.3,54.9 95.3,54.9 99.3,54.9 103.3,54.9 115.3,54.9 60.4,55.5 51.8,56 112.3,56.9 116.2,56.9 121.8,56.9 125.5,57 128.5,57 136.6,57.2 87.8,57.4 89.8,57.4 94.3,57.4 96.3,57.4 88.8,58.4 95.3,58.4 63.5,58.7 67.4,58.7 87.8,59.4 89.8,59.4 94.3,59.4 96.3,59.4 123,59.5 88.8,60.4 95.3,60.4 87.8,61.4 89.8,61.4 92.3,61.4 94.3,61.4 96.3,61.4 77.8,71.4 79.8,71.4 78.8,71.9 77.8,72.4 79.8,72.4 102.3,72.9 104.5,72.9 106.8,72.9 120.8,73.9 124.8,73.9 128.8,73.9 51.7,74 136.5,74 59.7,75 77.8,75.4 80.3,75.4 99.3,75.4 70.3,75.9 108.8,75.9 111.8,75.9 115.8,75.9 119.8,75.9 123.8,75.9 76.8,76.4 78.8,76.4 126.6,77 77.8,77.4 79.8,77.4 64.2,77.8 67.9,77.8 60.5,77.9 98.8,77.9 106.8,77.9 110.8,77.9 114.8,77.9 118.8,77.9 122.8,77.9 76.8,78.4 78.8,78.4 80.8,78.4 51.7,79.9 62.8,79.9 66.8,79.9 85.8,79.9 90.8,79.9 95.8,79.9 99.8,79.9 103.8,79.9 107.8,79.9 111.8,79.9 115.8,79.9 119.8,79.9 123.8,79.9 127.8,79.9 59.3,80 136.5,80
  other v2: 103,63 102.3,63.7 103.7,63.7 103,64.6 102.3,65.2 103.7,65.2 75.5,65.4 76.5,65.4 77.5,65.4 76.1,66.2 77.1,66.2 75.6,67 76.6,67 77.5,67
NetC2_1: C2.1 C3.1 C9.1 DD1.18 DD1.19 DD1.20 DD2.2 VD5.1
NetC4_1: C4.1 DD2.6 R6.2 | length 11.8
  Top Layer w0.3: R6.2@104.925,58.15 104.925,59.375 105.6,60.05 108.6,60.05 109.5,60.95 109.5,62.15 109.4,62.25 108.6,62.25 107.335,63.515 DD2.6
NetC5_1: C5.1 R6.1 | length 8
  Top Layer w0.3: R6.1@106.475,58.15 109,58.15 111.5,60.65 C5.1
NetC6_1: C6.1 DD1.10 | length 22.9
  Top Layer w0.3: v1(63.06,73.4) 64.42,73.4 C6.1@64.46,73.4 ; v1(71.3,62.5) 71.875,63.075 DD1.10
  Bottom Layer w0.3: v1(63.06,73.4) 64.26,74.6 68.2,74.6 71.3,71.5 v1(71.3,62.5)
NetC7_1: C7.1 DD1.13 S1.2 | length 29.9
  Top Layer w0.3: S1.2@73.85,74.26 82.95,74.26 83.01,74.2 v1(85.2,74.2) ; DD1.13 79.469,64.356 80.544,64.356 81.4,63.5 v1(81.4,63.1) 82.3,62.2 C7.1@82.3,60.3
  Bottom Layer w0.3: v1(81.4,63.1) 85.2,66.9 v1(85.2,74.2)
NetDD1_7: DD1.7 R2.1 R3.2 | length 8.4
  Top Layer w0.3: R2.1@67.125,67.2 67.125,66.376 67.301,66.2 68.524,66.2 68.7,66.024 68.7,65.125 68.675,65.1 68.725,65.15 72.676,65.15 72.782,65.044 73.531,65.044 DD1.7
NetDD1_8: DD1.8 R3.1 R4.2 | length 8.9
  Top Layer w0.3: R4.2@67.125,63 67.125,64.05 ; R3.1@67.125,65.1 67.125,64.05 ; DD1.8 73.531,64.394 72.725,64.394 72.469,64.65 70.097,64.65 69.497,64.05 67.125,64.05
NetDD1_9: DD1.9 R4.1 VD3.2 VT1.S | length 5.2
  Top Layer w0.3: R4.1@68.675,63 70,63 70.725,63.725 DD1.9
NetDD1_11: DD1.11 R7.1 | length 9.3
  Top Layer w0.3: DD1.11 79.469,63.056 80.525,63.056 80.8,62.781 80.8,56.6 81.3,56.1 R7.1@82.225,56.1
NetDD2_4: DD2.4 R5.2
NetHL1_2: "PWR OUT.2" R10.1
NetR1_1: R1.1 VD1.1 VT1.G | length 30.7
  Top Layer w0.3: VD1.1 69,53.4 71,53.4 71.4,53 v1(72.2,53) 72.2,53.8 71.6,54.4 71.6,56.9 71.795,57.095 VT1.G@73.56,57.095 ; v1(69.8,71.5) 70.975,71.5 71.075,71.4 R1.1@71,71.475 ; VT1.G@73.465,56.995 VT1.G@73.56,57.09
  Bottom Layer w0.3: v1(69.8,71.5) 69.8,55.4 v1(72.2,53)
NetVD1_2: VD1.2 VD2.2
SW: C8.1 DD2.8 L1.1 VD4.1 | length 7.3
  Top Layer w0.3: C8.1@99.5,69.6 v1(101.1,69.6)
  Bottom Layer w0.3: v1(101.1,69.6) 101.15,69.55 106.75,69.55 v1(106.8,69.5)
pads on no net: DD1.4 DD1.5 DD1.14 DD1.15 DD1.16 DD1.17 DD2.3

## Polygon pours and split planes (outlines as drawn)
GND on Top Layer "Top Layer-GND" (solid, pour order 42): 50,81.5 137.7,81.5 137.7,50 137.6,50 50,50
NetC2_1 on Top Layer "Top Layer-NetC2_1" (solid, pour order 28): 78.4,67.3 85.4,67.3 85.4,62.2 97.3,62.2 97.3,64.2 101.4,64.2 101.4,65.4 97.3,65.4 97.3,75.5 86.4,75.5 86.4,70.6 78.4,70.6
48V_IN on Top Layer "Top Layer-48V_IN" (solid, pour order 26): 57.7,59.8 61.7,59.8 61.7,67.8 66.1,67.8 66.1,68.2 68.4,68.2 72.2,68.2 72.2,67.3 74.6,67.3 74.6,70.6 61.7,70.6 61.7,71.4 57.7,71.4
SW on Top Layer "Top Layer-SW" (solid, pour order 10): 107.5,65.45 107.5,67.4 117,67.4 117,71.6 106.8,71.6 104.7,69.2 104.7,65.45
5V_OUT on Top Layer "Top Layer-5V_OUT" (solid, pour order 6): 130.6,59.4 130.6,65.9 130.6,73.2 117.6,73.2 117.6,65.65 117.6,62.85 122.3,62.85 122.3,62.75 125.6,62.75 125.6,59.4
FB on Top Layer "Top Layer-FB" (solid, pour order 40): 105.7,55.5 110.6,55.5 110.6,53.6 105.7,53.6
NetDD2_4 on Top Layer "Top Layer-NetDD2_4" (solid, pour order 32): 101.4,62.9 98.5,62.9 98.5,57.3 101,57.3 101,60.3 101.4,60.3
NetVD1_2 on Top Layer "Top Layer-NetVD1_2" (solid, pour order 24): 62.9,57.4 62.9,53.9 65.9,53.9 67.4,54.9 70.2,54.9 70.2,57.4
NetDD1_9 on Top Layer "Top Layer-NetDD1_9" (solid, pour order 16): 62.6,60.5 72.3,60.5 72.3,57.7 74.7,57.7 74.7,64 72.6,64 72.6,63.4 74.4,63.4 74.4,62.6 72.6,62.6 72.6,61.9 65.6,61.9 65.6,67.1 62.6,67.1
NetHL1_2 on Top Layer "Top Layer-NetHL1_2" (solid, pour order 2): 120.5,58.35 120.5,62.55 118.5,62.55 118.5,58.35
no net on Top Layer "Top Layer-No Net" (solid, pour order 30): 109.1,68.4
no net on Top Layer "Top Layer-No Net 1" (solid, pour order 12): 114.1,76
no net on Top Layer "Top Layer-No Net 2" (solid, pour order 4): 136,80.8
GND on Bottom Layer "Bottom Layer-GND" (solid, pour order 36): 50,81.5 50.5,81.5 137.7,81.5 137.7,50 124,50 50,50

## Silkscreen, mask and mechanical layers (free items; w line width, h text height)
Top Overlay:
  text "Buck / 48V-5V" at 100.3,74.4 h3
  text ".designation" at 99.5,50.8 h2
Bottom Overlay:
  text ".pcb_dec_number" at 115.6,50.8 h2
Board:
  the board outline again, w0.3
Assembly Notes (Mech5):
  text "'.title'" at 50,47.5 h2
  text "'.project'_'.pcb_dec_number'['.Pcb_File_Name_No_Path']" at 50,45 h2